# EAGLE board ATmega328p-DHT11-DS1307-LCD (EAGLE 9.2.2)

Size 100 x 80 mm. Coordinates in mm from the lower left corner, seen from the top.
Outline: 0,0 100,0 100,80 0,80 0,0
Copper layers (1*16): Top 0.035mm / dielectric 1.5mm / Bottom 0.035mm
Design rules "default": minimum track width 6mil, minimum drill 0.35mm, track to track 6mil, track to pad 6mil, pad to pad 6mil, via to via 6mil, smd to smd 6mil, copper to edge 40mil, drill to drill 6mil, minimum pad ring 10mil, minimum via ring 8mil, stop-mask expansion 4mil, vias tented up to drill 0mil, thermal gap 10mil

## Footprints (pad centres in the part's own frame; a part is rotated, then mirrored left to right if it is on the bottom)
BATTCOM_20MM_PTH = drill 1.3: 1 11.85,0; 2 -8.15,0
DIL08 = drill 0.813 long: 1 -3.81,-3.81; 2 -1.27,-3.81; 3 1.27,-3.81; 4 3.81,-3.81; 5 3.81,3.81; 6 1.27,3.81; 7 -1.27,3.81; 8 -3.81,3.81
1X02 = drill 1.016 pad 1.88: 1 0,0; 2 2.54,0
1X14 = drill 1.016 pad 1.88: 1 0,0; 2 2.54,0; 3 5.08,0; 4 7.62,0; 5 10.16,0; 6 12.7,0; 7 15.24,0; 8 17.78,0; 9 20.32,0; 10 22.86,0; 11 25.4,0; 12 27.94,0; 13 30.48,0; 14 33.02,0
LCD-16X2 = drill 1.016 pad 1.88 square: 1 -32,15.5 | drill 1.016 pad 1.88: 2 -29.46,15.5; 3 -26.92,15.5; 4 -24.38,15.5; 5 -21.84,15.5; 6 -19.3,15.5; 7 -16.76,15.5; 8 -14.22,15.5; 9 -11.68,15.5; 10 -9.14,15.5; 11 -6.6,15.5; 12 -4.06,15.5; 13 -1.52,15.5; 14 1.02,15.5; 15 3.56,15.5; 16 6.1,15.5 | hole 2.8: -37.5,15.5; -37.5,-15.5; 37.5,15.5; 37.5,-15.5
TACTILE_SWITCH_PTH_6.0MM = drill 1.016 pad 1.88: 1 -3.251,2.261; 2 3.251,2.261; 3 -3.251,-2.261; 4 3.251,-2.261
TC26H = drill 0.813 pad 1.676: 1 -1.27,0; 2 1.27,0
AXIAL-0.3 = drill 0.9 pad 1.88: P$1 -3.81,0; P$2 3.81,0
SWITCH_SPDT_PTH_11.6X4.0MM = drill 1.016 pad 1.88: 1 0,2.54; 2 0,0; 3 0,-2.54
DIP28 = drill 0.813 pad 1.626: 1 -16.51,-3.81; 2 -13.97,-3.81; 3 -11.43,-3.81; 4 -8.89,-3.81; 5 -6.35,-3.81; 6 -3.81,-3.81; 7 -1.27,-3.81; 8 1.27,-3.81; 9 3.81,-3.81; 10 6.35,-3.81; 11 8.89,-3.81; 12 11.43,-3.81; 13 13.97,-3.81; 14 16.51,-3.81; 15 16.51,3.81; 16 13.97,3.81; 17 11.43,3.81; 18 8.89,3.81; 19 6.35,3.81; 20 3.81,3.81; 21 1.27,3.81; 22 -1.27,3.81; 23 -3.81,3.81; 24 -6.35,3.81; 25 -8.89,3.81; 26 -11.43,3.81; 27 -13.97,3.81; 28 -16.51,3.81
TEMP-HUM-SENSOR-DHT11 = drill 0.8 square: 1 -3.81,0 | drill 0.8: 2 -1.27,0; 3 1.27,0; 4 3.81,0

## Placement (x,y rotation side)
BT1  [BATTCOM_20MM_PTH]  60.96,53.34 0 top
IC1  DS1307  [DIL08]  66.04,35.56 0 top
J1  [1X02]  12.7,33.02 0 top
J2  [1X14]  29.21,6.35 0 top
J3  [1X14]  29.21,11.43 0 top
LCD1  LCD-16X2SILK  [LCD-16X2]  48.26,59.69 0 top
MENU_TACTILE  MOMENTARY-SWITCH-SPST-PTH-6.0MM  [TACTILE_SWITCH_PTH_6.0MM]  81.28,22.86 0 top
Q1  [TC26H]  44.45,43.18 0 top
R1  2K2  [AXIAL-0.3]  93.98,36.83 0 top
R2  220  [AXIAL-0.3]  93.98,33.02 0 top
R3  10K  [AXIAL-0.3]  15.24,41.91 0 top
R4  10K  [AXIAL-0.3]  15.24,38.1 0 top
R5  5K1  [AXIAL-0.3]  15.24,21.59 0 top
R6  100  [AXIAL-0.3]  15.24,17.78 0 top
R7  5K1  [AXIAL-0.3]  15.24,13.97 0 top
R8  100  [AXIAL-0.3]  15.24,10.16 0 top
R9  5K1  [AXIAL-0.3]  15.24,6.35 0 top
RESET_TACTILE  MOMENTARY-SWITCH-SPST-PTH-6.0MM  [TACTILE_SWITCH_PTH_6.0MM]  85.09,31.75 0 top
S1  [SWITCH_SPDT_PTH_11.6X4.0MM]  7.62,10.16 0 top
U1  328P  [DIP28]  58.42,19.05 0 top
U$1  TEMP-HUM-SENSOR-DHT11  [TEMP-HUM-SENSOR-DHT11]  36.83,36.83 0 top

## Library data of the parts
BT1 = SparkFun-Batteries; PROD_ID: BATT-09031; SF_SKU: PRT-00783
IC1 = adafruit
J1-J3 = SparkFun-Connectors
LCD1 = SparkFun-Displays; SF_ID: LCD-00255
MENU_TACTILE RESET_TACTILE = SparkFun-Switches; PROD_ID: SWCH-08441; SF_SKU: COM-00097
Q1 = adafruit; OC_FARNELL: unknown; OC_NEWARK: unknown
R1-R9 = SparkFun-Resistors; PROD_ID: RES-08380
S1 = SparkFun-Switches; PROD_ID: SWCH-08261; SF_SKU: COM-00102
U1 = SparkFun-IC-Microcontroller; PROD_ID: IC-09136
U$1 = diy-modules

## Nets
BAT_P: J1.2 S1.1
DEBUG: U1.17
DHT_DAT: R5.P$1 U1.15 U$1.2
DHT_PWR: R5.P$2 U1.16 U$1.1
DS1307_PWR: IC1.8 U1.10
GND: BT1.2 IC1.4 J1.1 LCD1.1 LCD1.5 R1.P$2 R6.P$1 R8.P$1 S1.3 U1.8 U1.22 U$1.4
LCD_BACKLIGHT: LCD1.16 U1.14
LCD_D4: LCD1.11 U1.6
LCD_D5: LCD1.12 U1.11
LCD_D6: LCD1.13 U1.12
LCD_D7: LCD1.14 U1.13
LCD_E: LCD1.6 U1.5
LCD_PWR: LCD1.2 U1.9
LCD_RS: LCD1.4 U1.4
MENU: MENU_TACTILE.3 R9.P$1 U1.18
N$1: MENU_TACTILE.1 R8.P$2
N$2: BT1.1 IC1.3
N$3: LCD1.3 R1.P$1
N$4: R6.P$2 RESET_TACTILE.1
N$5: U1.2
N$6: U1.3
N$7: IC1.1 Q1.1
N$8: IC1.2 Q1.2
N$9: U1.23
N$10: U1.24
N$11: U1.25
N$15: LCD1.15 R2.P$1
RST: R7.P$1 RESET_TACTILE.3 U1.1
SCL: IC1.6 R3.P$2 U1.28
SDA: IC1.5 R4.P$2 U1.27
SQW: IC1.7
SYSPWR: R2.P$2 R3.P$1 R4.P$1 R7.P$2 R9.P$2 S1.2 U1.7

## Tracks (layer width: path | path; a pad name or v marks a point on that pad's centre or on a via)
BAT_P  (1 unrouted)
DHT_DAT  (2 unrouted)
DHT_PWR  (2 unrouted)
DS1307_PWR  (1 unrouted)
GND  (11 unrouted)
LCD_BACKLIGHT  (1 unrouted)
LCD_D4  (1 unrouted)
LCD_D5  (1 unrouted)
LCD_D6  (1 unrouted)
LCD_D7  (1 unrouted)
LCD_E  (1 unrouted)
LCD_PWR  (1 unrouted)
LCD_RS  (1 unrouted)
MENU  (2 unrouted)
N$1  (1 unrouted)
N$2  (1 unrouted)
N$3  (1 unrouted)
N$4  (1 unrouted)
N$7  (1 unrouted)
N$8  (1 unrouted)
N$15  (1 unrouted)
RST  (2 unrouted)
SCL  (2 unrouted)
SDA  (2 unrouted)
SYSPWR  (6 unrouted)